# Altium PCB BOARD_CONN_805_24PIN.PcbDoc
Units mm, origin at the board's own origin, x right, y up, seen from the top; angles counter-clockwise.
Board outline 20 x 51 mm, 2 copper layers (Top Layer, Bottom Layer), stack 2.071 mm thick; 4 components, 8 nets, 26 pads, 2 vias.
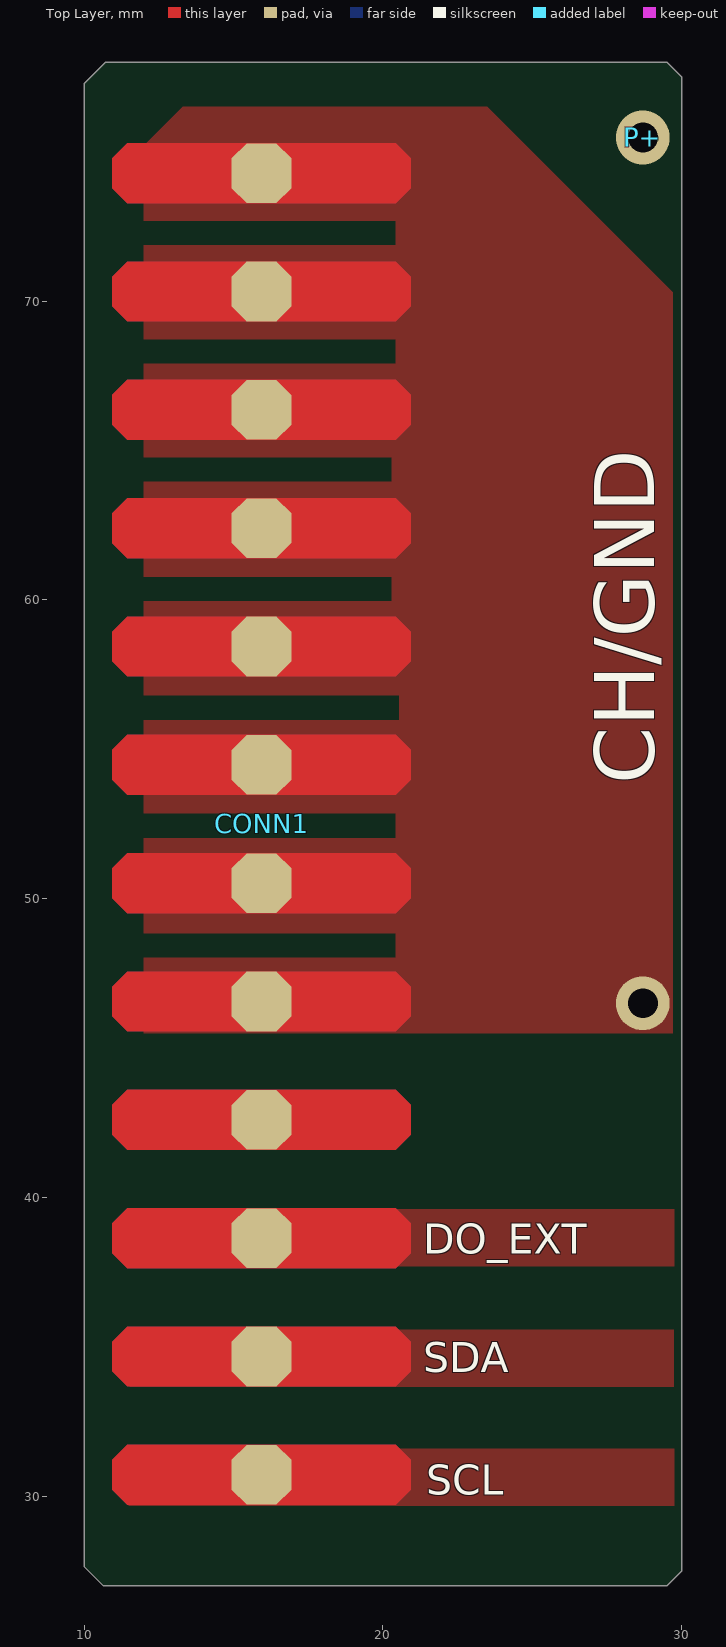
[diagram p0: Top Layer view]
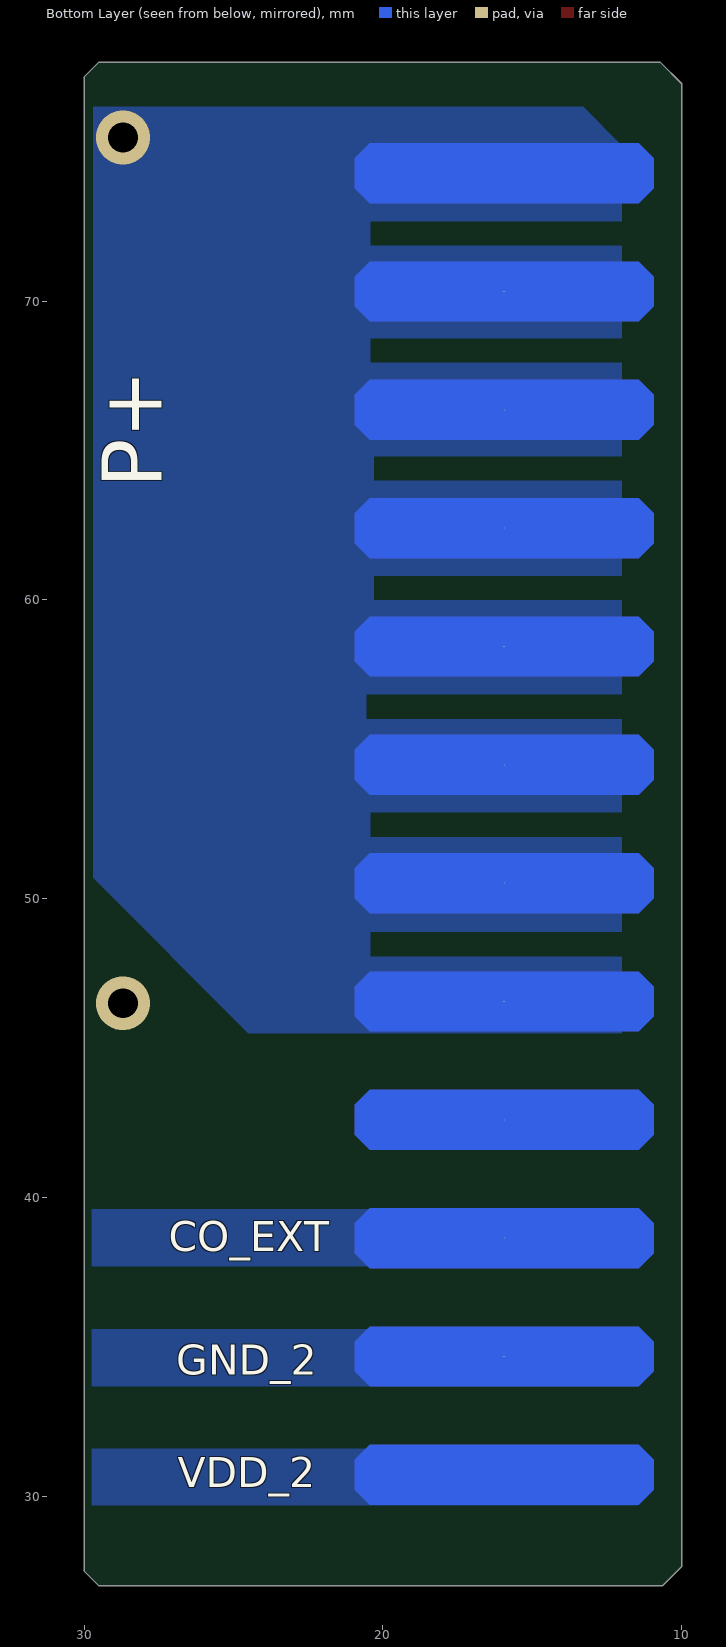
[diagram p1: Bottom Layer view, seen from below]

## Layer stack, top to bottom
Top Solder: solder mask 0.0102, Solder Resist, Dk 3.5
Top Layer: signal copper 0.0356
Dielectric 1: dielectric 2, FR-4, Dk 4.8
Bottom Layer: signal copper 0.0356
Bottom Solder: solder mask 0.0102, Solder Resist, Dk 3.5

## Board outline
10.65,27 10,27.65 10,77.275 10.725,78 29.5,78 30,77.5 30,27.5 29.5,27

## Design rules (kind name [scope] priority, off if disabled: settings)
Clearance [All] p1: gap=0.2 ignorepadtopadclearanceinfootprint=TRUE except(0.4: THPad-THPad THPad-Poly THPad-Region THPad-Text THPad-Hole Fill-Fill Fill-Region Fill-Text Fill-Hole; 0.5: Arc-Poly; 0.7: Arc-Fill Fill-Poly)
ComponentClearance [All] p1: gap=0.254 collisioncheckmode=3 verticalgap=-10 showdistances=FALSE
DiffPairsRouting [All] p1: maxlimit=0.254 minlimit=0.1 mostfreqgap=0.1 toplayer_minwidth=0.381 toplayer_maxwidth=0.381 toplayer_prefwidth=0.381 bottomlayer_minwidth=0.381 bottomlayer_maxwidth=0.381 bottomlayer_prefwidth=0.381 maxuncoupledlength=12.7
Height [All] p1: minheight=0 maxheight=45 prefheight=12.7
HoleSize [All] p1: absolutevalues=TRUE maxlimit=10 minlimit=0.025 maxpercent=80.000 minpercent=20.000
HoleToHoleClearance [All] p1: gap=0 allowstackedmicrovias=TRUE
MinimumSolderMaskSliver [All] p1: minsoldermaskwidth=0.1
PlaneClearance PlaneClearance_1 [All] p1: clearance=1
PolygonConnect PolygonConnect_1 [All] p1: connectstyle=Direct reliefconductorwidth=0.254 reliefentries=4 polygonreliefangle="90 Angle" airgapwidth=0.254
RoutingVias [All] p1: holewidth=0.4 width=0.8 viastyle="Through Hole" minholewidth=0.4 minwidth=0.8 maxholewidth=4 maxwidth=6
ShortCircuit [All] p1: allowed=TRUE
SilkToSilkClearance [All] p1: silktosilkclearance=0.1
SilkToSolderMaskClearance [IsPad] p1: minsilkscreentomaskgap=0 clearancetoexposedcopper=TRUE
SolderMaskExpansion [All] p1: expansion=0.1 istentingtop=FALSE
Width [All] p1: maxlimit=12.7 minlimit=0.254 preferedwidth=1 bottomlayer_prefwidth=0.508 minimp=50.000000 maximp=50.000000 favimp=50.000000
20 further rules are at their usual default settings.

## Components (designator, comment, footprint, x,y, rotation, side; value= is the part's Value field where it differs from the comment)
CH/GND "Test_Point_PCB" Test_Point 28.7,46.5 r90 top
CONN1 "CONN_805_24P" CONN_805_24P 10,52.5 r180 top locked
CONN2 "805_24P" 805_24P 1,52.5 r90 top
P+ "Test_Point_PCB" Test_Point 28.7,75.475 r0 top

## Footprints (in the part's own frame and the unit in brackets; to place one, negate y for a bottom-side part, rotate by r counter-clockwise, add the part's x,y. Pads: shape width x height; smd on the part's side, far side on the other; paste and mask are expansions set on the pad)
805_24P [mm]
  body extent -34.5,-14.6 34.5,2.7, height 4
CONN_805_24P [mm]
  oct 2x2 smd: 1(-5.94,21.78) 2(-5.94,17.82) 3(-5.94,13.86) 4(-5.94,9.9) 5(-5.94,5.94) 6(-5.94,1.98) 7(-5.94,-1.98) 8(-5.94,-5.94) 9(-5.94,-9.9) 10(-5.94,-13.86) 11(-5.94,-17.82) 12(-5.94,-21.78)
  round 0.025 smd far side: 13(-5.94,-21.78) 14(-5.94,-17.82) 15(-5.94,-13.86) 16(-5.94,-9.9) 17(-5.94,-5.94) 18(-5.94,-1.98) 19(-5.94,1.98) 20(-5.94,5.94) 21(-5.94,9.9) 22(-5.94,13.86) 23(-5.94,17.82) 24(-5.94,21.78)
  Top Layer region: -10.44,0.98 -10.94,1.48 -10.94,2.48 -10.44,2.98 -1.44,2.98 -0.94,2.48 -0.94,1.48 -1.44,0.98
  Top Layer region: -10.44,4.94 -10.94,5.44 -10.94,6.44 -10.44,6.94 -1.44,6.94 -0.94,6.44 -0.94,5.44 -1.44,4.94
  Top Layer region: -10.44,-2.98 -10.94,-2.48 -10.94,-1.48 -10.44,-0.98 -1.44,-0.98 -0.94,-1.48 -0.94,-2.48 -1.44,-2.98
  Top Layer region: -10.44,-6.94 -10.94,-6.44 -10.94,-5.44 -10.44,-4.94 -1.44,-4.94 -0.94,-5.44 -0.94,-6.44 -1.44,-6.94
  Top Layer region: -10.44,-10.9 -10.94,-10.4 -10.94,-9.4 -10.44,-8.9 -1.44,-8.9 -0.94,-9.4 -0.94,-10.4 -1.44,-10.9
  Top Layer region: -10.44,8.9 -10.94,9.4 -10.94,10.4 -10.44,10.9 -1.44,10.9 -0.94,10.4 -0.94,9.4 -1.44,8.9
  Top Layer region: -10.44,12.86 -10.94,13.36 -10.94,14.36 -10.44,14.86 -1.44,14.86 -0.94,14.36 -0.94,13.36 -1.44,12.86
  Top Layer region: -10.44,16.82 -10.94,17.32 -10.94,18.32 -10.44,18.82 -1.44,18.82 -0.94,18.32 -0.94,17.32 -1.44,16.82
  Top Layer region: -10.44,20.78 -10.94,21.28 -10.94,22.28 -10.44,22.78 -1.44,22.78 -0.94,22.28 -0.94,21.28 -1.44,20.78
  Top Layer region: -10.44,-14.86 -10.94,-14.36 -10.94,-13.36 -10.44,-12.86 -1.44,-12.86 -0.94,-13.36 -0.94,-14.36 -1.44,-14.86
  Top Layer region: -10.44,-18.82 -10.94,-18.32 -10.94,-17.32 -10.44,-16.82 -1.44,-16.82 -0.94,-17.32 -0.94,-18.32 -1.44,-18.82
  Top Layer region: -10.44,-22.78 -10.94,-22.28 -10.94,-21.28 -10.44,-20.78 -1.44,-20.78 -0.94,-21.28 -0.94,-22.28 -1.44,-22.78
  Bottom Layer region: -10.44,-14.86 -10.94,-14.36 -10.94,-13.36 -10.44,-12.86 -1.44,-12.86 -0.94,-13.36 -0.94,-14.36 -1.44,-14.86
  Bottom Layer region: -10.44,-2.98 -10.94,-2.48 -10.94,-1.48 -10.44,-0.98 -1.44,-0.98 -0.94,-1.48 -0.94,-2.48 -1.44,-2.98
  Bottom Layer region: -10.44,0.98 -10.94,1.48 -10.94,2.48 -10.44,2.98 -1.44,2.98 -0.94,2.48 -0.94,1.48 -1.44,0.98
  Bottom Layer region: -10.44,-6.94 -10.94,-6.44 -10.94,-5.44 -10.44,-4.94 -1.44,-4.94 -0.94,-5.44 -0.94,-6.44 -1.44,-6.94
  Bottom Layer region: -10.44,-10.9 -10.94,-10.4 -10.94,-9.4 -10.44,-8.9 -1.44,-8.9 -0.94,-9.4 -0.94,-10.4 -1.44,-10.9
  Bottom Layer region: -10.44,4.94 -10.94,5.44 -10.94,6.44 -10.44,6.94 -1.44,6.94 -0.94,6.44 -0.94,5.44 -1.44,4.94
  Bottom Layer region: -10.44,8.9 -10.94,9.4 -10.94,10.4 -10.44,10.9 -1.44,10.9 -0.94,10.4 -0.94,9.4 -1.44,8.9
  Bottom Layer region: -10.44,12.86 -10.94,13.36 -10.94,14.36 -10.44,14.86 -1.44,14.86 -0.94,14.36 -0.94,13.36 -1.44,12.86
  Bottom Layer region: -10.44,16.82 -10.94,17.32 -10.94,18.32 -10.44,18.82 -1.44,18.82 -0.94,18.32 -0.94,17.32 -1.44,16.82
  Bottom Layer region: -10.44,-18.82 -10.94,-18.32 -10.94,-17.32 -10.44,-16.82 -1.44,-16.82 -0.94,-17.32 -0.94,-18.32 -1.44,-18.82
  Bottom Layer region: -10.44,-22.78 -10.94,-22.28 -10.94,-21.28 -10.44,-20.78 -1.44,-20.78 -0.94,-21.28 -0.94,-22.28 -1.44,-22.78
  Bottom Layer region: -10.44,20.78 -10.94,21.28 -10.94,22.28 -10.44,22.78 -1.44,22.78 -0.94,22.28 -0.94,21.28 -1.44,20.78
Test_Point [mm]
  round 1.8 hole 1 paste-2539.97 mask+0.102: 1(0,0)

## Part data
CH/GND P+: library part TP_PCB?, "Test_Point"

## Via types
v1: diameter 1.8, hole 1, Top Layer to Bottom Layer, 2 vias

## Nets (pads, with @x,y where several pads share a name; then routed paths per layer and width w, separated by ;. In a path a pad name is that pad's centre, name@x,y a point inside that pad or via, vN(x,y) a via of type N, cw(c..) or ccw(c..) an arc to the next point about the centre after c; other vN are vias at no path point)
CH: CH/GND.1 CONN1.5 CONN1.6 CONN1.7 CONN1.8 CONN1.9 CONN1.10 CONN1.11 CONN1.12
  other v1: 28.7,46.5
CO_EXT: CONN1.22
DO_EXT: CONN1.3
GND_2: CONN1.23
P+: CONN1.13 CONN1.14 CONN1.15 CONN1.16 CONN1.17 CONN1.18 CONN1.19 CONN1.20 P+.1
  other v1: 28.7,75.475
SCL_2: CONN1.1
SDA_2: CONN1.2
VDD_2: CONN1.24
pads on no net: CONN1.4 CONN1.21

## Polygon pours and split planes (outlines as drawn)
DO_EXT on Top Layer "NONET_L-01_P-001" (solid, pour order 7): 11.5,39.6 11.5,37.7 29.75,37.7 29.75,39.6
SDA_2 on Top Layer "NONET_L-01_P-001" (solid, pour order 6): 11.534,35.57 11.534,33.67 29.734,33.67 29.734,35.57
SCL_2 on Top Layer "NONET_L-01_P-001" (solid, pour order 5): 11.494,31.592 11.494,29.692 29.75,29.692 29.75,31.592
CH on Top Layer "NONET_L-01_P-001" (solid, pour order 0): 12,45.5 12,75.2 13.3,76.5 23.5,76.5 29.7,70.3 29.7,45.5
VDD_2 on Bottom Layer "NONET_L-01_P-001" (solid, pour order 4): 11.5,31.6 11.5,29.7 29.75,29.7 29.75,31.6
GND_2 on Bottom Layer "NONET_L-01_P-001" (solid, pour order 3): 11.494,35.592 11.494,33.692 29.75,33.692 29.75,35.592
CO_EXT on Bottom Layer "NONET_L-01_P-001" (solid, pour order 2): 11.5,39.6 11.5,37.7 29.75,37.7 29.75,39.6
P+ on Bottom Layer "NONET_L-01_P-001" (solid, pour order 1): 12,45.5 24.5,45.5 29.7,50.7 29.7,76.5 13.3,76.5 12,75.2
no net on Top Solder "NONET_L-01_P-001" (solid): 24.175,52.9 24.175,47.375 29.7,47.375 29.7,52.9
no net on Top Solder "NONET_L-01_P-001" (solid): 27.499,31.6 27.499,29.7 29.75,29.7 29.75,31.6
no net on Top Solder "NONET_L-01_P-001" (solid): 27.5,35.575 27.5,33.675 29.75,33.675 29.75,35.575
no net on Top Solder "NONET_L-01_P-001" (solid): 27.5,39.6 27.5,37.7 29.75,37.7 29.75,39.6
no net on Bottom Solder "NONET_L-01_P-001" (solid): 24.2,74.6 24.2,69.063 29.725,69.063 29.725,74.6
no net on Bottom Solder "NONET_L-01_P-001" (solid): 27.5,39.6 27.5,37.7 29.75,37.7 29.75,39.6
no net on Bottom Solder "NONET_L-01_P-001" (solid): 27.499,31.6 27.499,29.7 29.751,29.7 29.751,31.6
no net on Bottom Solder "NONET_L-01_P-001" (solid): 27.5,35.6 27.5,33.675 29.75,33.675 29.75,35.6

## Other copper
Top Layer:
  pour cut-out: 20.425,71.862 11.75,71.862 11.75,72.687 20.425,72.687
  pour cut-out: 20.425,67.902 11.75,67.902 11.75,68.727 20.425,68.727
  pour cut-out: 20.3,63.952 11.75,63.952 11.75,64.777 20.3,64.777
  pour cut-out: 20.3,59.952 11.75,59.952 11.75,60.777 20.3,60.777
  pour cut-out: 20.425,48.027 11.725,48.027 11.725,48.852 20.425,48.852
  pour cut-out: 20.425,52.027 11.75,52.027 11.75,52.852 20.425,52.852
  pour cut-out: 20.55,55.977 11.75,55.977 11.75,56.802 20.55,56.802
Bottom Layer:
  pour cut-out: 20.425,71.85 11.75,71.85 11.75,72.675 20.425,72.675
  pour cut-out: 20.425,67.937 11.75,67.937 11.75,68.762 20.425,68.762
  pour cut-out: 20.3,63.987 11.75,63.987 11.75,64.812 20.3,64.812
  pour cut-out: 20.3,59.988 11.75,59.988 11.75,60.812 20.3,60.812
  pour cut-out: 20.55,56.013 11.75,56.013 11.75,56.838 20.55,56.838
  pour cut-out: 20.425,52.063 11.75,52.063 11.75,52.888 20.425,52.888
  pour cut-out: 20.425,48.063 11.725,48.063 11.725,48.888 20.425,48.888

## Silkscreen, mask and mechanical layers (free items; w line width, h text height)
Top Overlay:
  text "DO_EXT" at 21.354,38.121 h1
  text "SDA" at 21.354,34.154 h1
  text "SCL" at 21.454,30.054 h1
Bottom Overlay:
  text "CO_EXT" at 27.171,38.196 h1
  text "GND_2" at 26.921,34.071 h1
  text "VDD_2" at 26.871,30.296 h1
Mechanical 1:
  lines w0.254: 30,77.5 29.5,78 10.725,78 10,77.275 10,27.65 10.65,27 29.5,27 30,27.5 30,77.5 ; 30,77.5 30,77.5 ; 30,77.5 30,77.5